# Altium PCB S7CAS-PLEIADES-CARTE-MERE_P01.PcbDoc (part 6 of 9)
Units mil, origin at the board's own origin, x right, y up, seen from the top; angles counter-clockwise.
Board outline 6153 x 3696 mil, 16 copper layers (Top, Ground Plane 1, Signal Layer 1, Ground Plane 2, Signal Layer 2, Ground Plane 3, Power Plane, Ground Plane 4, Ground Plane 5, Power Plane 2, Ground Plane 6, Signal Layer 3, Ground Plane 7, Signal Layer 4, Ground Plane 8, Bottom), stack 75.282 mil thick; 430 components, 328 nets, 2174 pads, 2158 vias.
Unrouted connection lines stored in the file: 202.
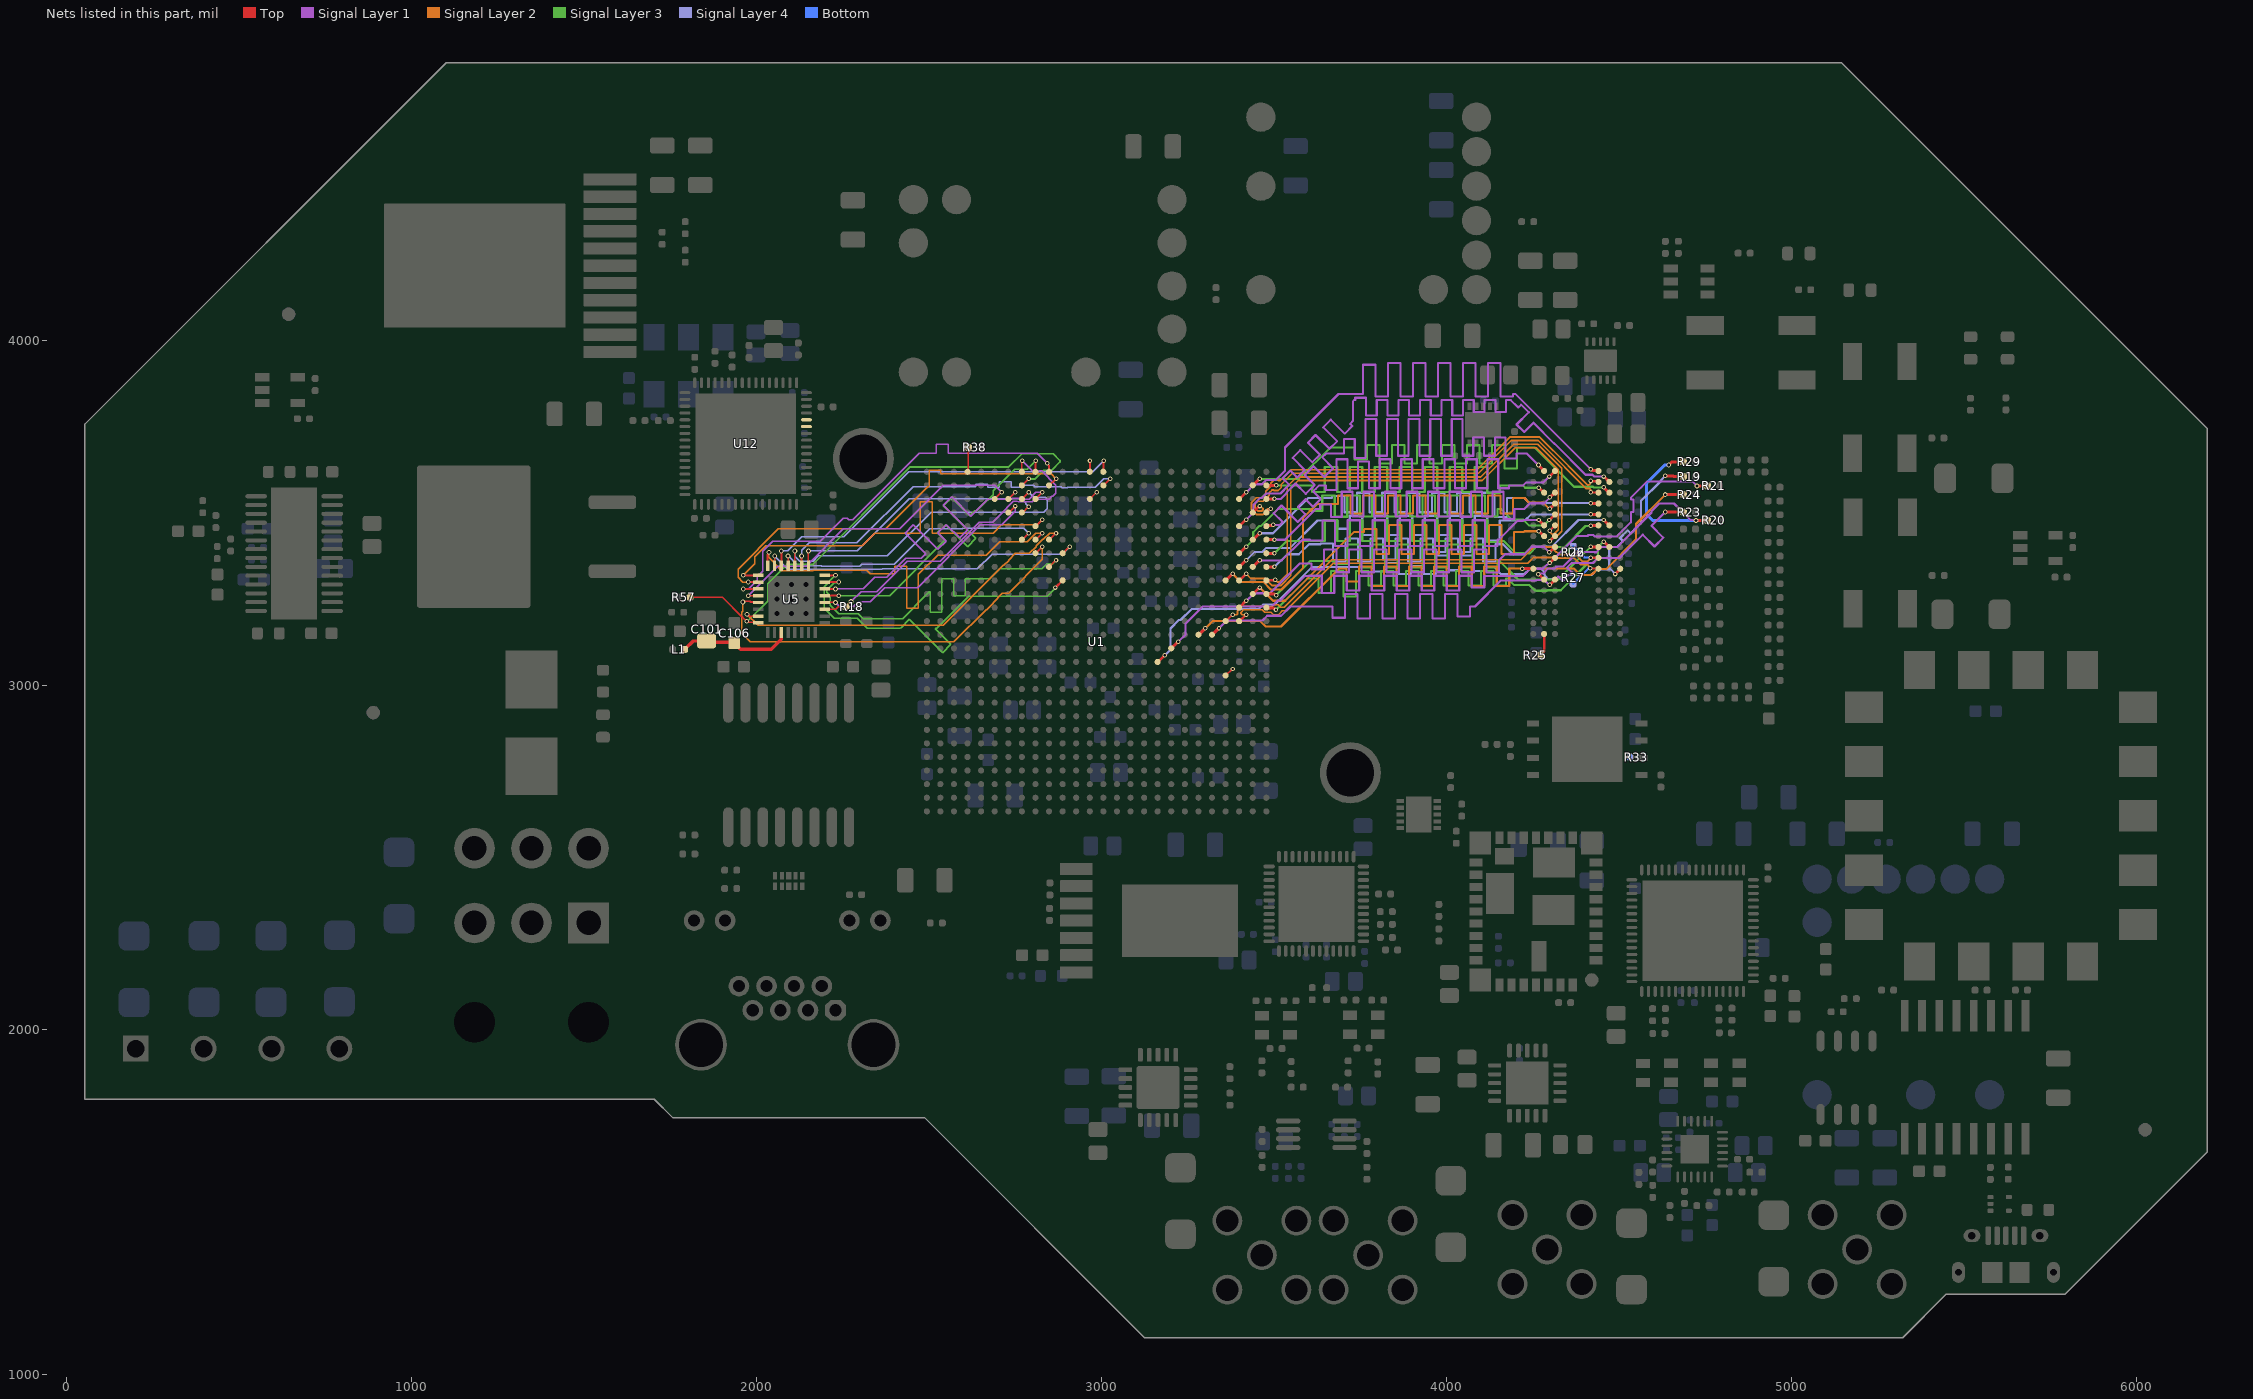
[diagram p18: the nets of this part, all layers, seen from the top]

## Via types
v1: diameter 14, hole 8, Top to Bottom, 1322 vias
v2: diameter 13, hole 7, Top to Bottom, 662 vias
v3: diameter 19.68, hole 7.87, Top to Bottom, 137 vias
v4: diameter 19.68, hole 11.81, Top to Bottom, 15 vias
v5: diameter 15.75, hole 7.87, Top to Bottom, 12 vias
v6: diameter 22, hole 12, Top to Bottom, 9 vias
v7: diameter 20, hole 12, Top to Bottom, 1 vias

## Nets (pads, with @x,y where several pads share a name; then routed paths per layer and width w, separated by ;. In a path a pad name is that pad's centre, name@x,y a point inside that pad or via, vN(x,y) a via of type N, cw(c..) or ccw(c..) an arc to the next point about the centre after c; other vN are vias at no path point) (continued)
DDR3_CK_N: R27.1 U1.R3 U2.K7 | length 1246.3
  Top w6.68: U1.R3@3400.33,3185.15 3400.33,3185.27 3419.15,3204.09 v2(3419.76,3204.09) ; v2(4417.4,3338.24) 4417.96,3337.68 4440.62,3337.68 U2.K7@4441.18,3337.12
  Signal Layer 2 w5.08: v2(3419.76,3204.09) 3419.7,3204.03 3408.15,3204.03 3405.18,3207 3405.18,3211.21 3412.17,3218.2 3466.28,3218.2 3473.34,3211.15 3491.89,3211.15 3500.06,3202.98 3512.52,3202.98 3521.33,3211.79 3521.33,3212.35 3524.3,3215.32 3534.58,3215.32 3672.16,3352.91 4236.17,3352.91 4253.16,3369.9 4321.49,3369.9 4322.82,3368.56 4369.56,3368.56 4389.68,3348.44 4404.94,3348.44 4405.37,3348.87 4409.58,3348.87 4412.55,3345.89 4412.55,3345.23 4417.4,3340.38 v2(4417.4,3338.24)
  Bottom w6.68: R27.1@4367.55,3292.82 4411.76,3337.03 4416.19,3337.03 v2(4417.4,3338.24)
DDR3_CK_P: R26.2 U1.R4 U2.J7 | length 1273.9
  Top w6.68: U1.R4@3360.96,3185.15 v2@3379.78,3203.97 ; v2(4418.98,3369.58) 4419.46,3369.1 4440.7,3369.1 U2.J7@4441.18,3368.61
  Signal Layer 2 w5.08: v2(3380.51,3203.97) 3380.57,3204.03 3392.12,3204.03 3395.1,3207 3395.1,3215.38 3408,3228.28 3470.46,3228.28 3477.52,3221.23 3488.28,3221.23 3491.25,3224.2 ; 3491.25,3224.25 3500.06,3233.06 3512.52,3233.06 3520.18,3225.4 3530.4,3225.4 3667.99,3362.98 4216.49,3362.98 4253.48,3399.97 4305.17,3399.97 4313.98,3391.16 4313.98,3389.68 4317.62,3386.03 4319.61,3386.03 4327,3378.64 4373.73,3378.64 4393.85,3358.52 4400.77,3358.52 4401.2,3358.95 4409.58,3358.95 4418.98,3368.35 v2(4418.98,3369.58)
  Bottom w6.68: R26.2@4368.03,3402.44 4400.89,3369.58 v2(4418.98,3369.58)
DDR3_CKE: R19.1 U1.M9 U2.K9 | length 2286.9
  Top w8.64: U1.M9@3164.11,3067.04 v2@3182.93,3085.86 ; v2(4490.19,3321.78) 4490.19,3322.45 4504.17,3336.43 U2.K9@4504.17,3337.12 ; v1(4634.98,3606.62) 4657.26,3606.62 4659.26,3604.62 4687.08,3604.62 R19.1@4687.48,3604.22
  Signal Layer 4 w6.24: v2(3183.66,3085.86) 3200.45,3102.64 3200.45,3164.1 3224.69,3188.35 3229.5,3188.35 3261.65,3220.49 3456.25,3220.49 3469.4,3233.64 3502.45,3233.64 3611.44,3342.63 3628.51,3342.63 3789.42,3342.63 3789.42,3329.34 3825.66,3329.34 3825.66,3353.48 3861.9,3353.48 3861.9,3322.02 3898.14,3322.02 3898.14,3345.03 3934.38,3345.03 3934.38,3322.02 3970.63,3322.02 3970.63,3375.83 4006.87,3375.83 4006.87,3332.9 4043.11,3332.9 4043.11,3375.83 4079.35,3375.83 4079.35,3330.79 4115.59,3330.79 4115.59,3342.63 4118.72,3342.63 4137.43,3342.63 4158.29,3321.76 4226.55,3321.76 4242.11,3337.32 4273.45,3337.32 4284.11,3326.66 4284.11,3319.96 4286.41,3317.66 4286.41,3316.15 4295.56,3307 4308.5,3307 4310.81,3309.3 4335.61,3309.3 4345.19,3318.88 4420.99,3318.88 4437.47,3335.36 4476.61,3335.36 ; v2(4490.19,3321.78) 4476.62,3335.36 ; v1(4634.98,3606.62) 4622.4,3594.04 4622.4,3591.64 4564.1,3533.34 4564.1,3469.07 4555.5,3460.47 4534.54,3439.52 4525.64,3448.42 4503.55,3426.33 4512.45,3417.43 4510.25,3415.22 4494.7,3399.67 4477.92,3399.67 4472.21,3393.96 4472.21,3377.58 4472.51,3377.28 4472.51,3339.46 4476.62,3335.36
DDR3_CS: R20.1 R29.1 U2.L2 | length 995
  Top w8.64: v2(4266.98,3321.7) 4267.3,3321.7 4283.38,3305.62 U2.L2@4283.7,3305.62 ; v1(4644.98,3637.72) 4654.48,3647.22 R29.1@4687.48,3647.22 ; v1(4723.89,3477.26) R20.1@4757.48,3477.29
  Signal Layer 1 w6.24: v2(4266.98,3321.7) 4268.27,3322.99 4280.31,3322.99 4295.56,3338.24 4314.29,3338.24 4319.66,3343.62 4338.92,3343.62 4380.5,3385.2 4428.97,3385.2 4429.23,3384.94 4434.83,3384.94 4449.57,3399.67 4494.7,3399.67 4594.98,3499.95 4594.98,3504.26 4617.08,3526.36 4659.98,3526.36 4707.59,3478.74 4722.41,3478.74 v1(4723.89,3477.26)
  Bottom w8.63: v1(4644.98,3637.72) 4633.07,3637.72 4580.66,3585.31 4580.66,3495.12 4598.52,3477.26 v1(4723.89,3477.26)
DDR3_DQ0: U1.Y3 U2.E3 | length 1875.8
  Top w8.64: U1.Y3@3400.33,3382 v2@3419.15,3400.82 ; v2@4299.06,3478.46 U2.E3@4315.2,3494.6
  Signal Layer 3 w6.24: v2(3419.88,3400.82) 3440.27,3421.21 3440.27,3443.3 3458.45,3461.48 3463.26,3461.48 3511.74,3509.95 3553.1,3509.95 3604.37,3509.95 3604.37,3504.94 3640.61,3504.94 3640.61,3549.2 3676.86,3549.2 3676.86,3487.98 3713.1,3487.98 3713.1,3549.2 3749.34,3549.2 3749.34,3488.37 3785.58,3488.37 3785.58,3549.2 3821.82,3549.2 3821.82,3488.37 3858.07,3488.37 3858.07,3549.2 3894.31,3549.2 3894.31,3488.37 3930.55,3488.37 3930.55,3549.2 3966.79,3549.2 3966.79,3488.37 4003.04,3488.37 4003.04,3549.2 4039.28,3549.2 4039.28,3488.37 4075.52,3488.37 4075.52,3549.2 4111.76,3549.2 4111.76,3488.37 4148,3488.37 4148,3509.95 4151.13,3509.95 4159.32,3509.95 4189.78,3479.5 4223.15,3479.5 4240.59,3462.05 4282.53,3462.05 v2(4298.94,3478.46)
DDR3_DQ1: U1.Y1 U2.F7 | length 1877.3
  Top w8.64: U1.Y1@3478.35,3382 v2(3501.9,3382) ; v2(4418.98,3462.05) 4419.5,3462.58 4440.66,3462.58 U2.F7@4441.18,3463.1
  Signal Layer 3 w6.24: v2(3501.9,3382) 3537.5,3417.6 3540.72,3417.6 3647.49,3417.6 3647.49,3477.74 3683.73,3477.74 3683.73,3417.6 3719.97,3417.6 3719.97,3478.13 3756.22,3478.13 3756.22,3417.6 3792.46,3417.6 3792.46,3478.13 3828.7,3478.13 3828.7,3417.6 3864.94,3417.6 3864.94,3478.13 3901.18,3478.13 3901.18,3417.6 3937.43,3417.6 3937.43,3478.13 3973.67,3478.13 3973.67,3417.6 4009.91,3417.6 4009.91,3478.13 4046.15,3478.13 4046.15,3417.6 4082.39,3417.6 4082.39,3478.13 4118.64,3478.13 4118.64,3415.12 4154.88,3415.12 4154.88,3417.6 4158,3417.6 4166.34,3417.6 4201.77,3382.17 4242.6,3382.17 4260.99,3400.56 4343.33,3400.56 4403.77,3460.99 4417.92,3460.99 v2(4418.98,3462.05)
DDR3_DQ2: U1.W2 U2.F2 | length 1959.5
  Top w8.64: U1.W2@3439.7,3342.63 v2@3458.52,3361.45 ; v2(4267.7,3478.46) 4268.03,3478.46 4283.38,3463.1 U2.F2@4283.7,3463.1
  Signal Layer 1 w6.24: v2(3459.25,3361.45) 3523.42,3361.45 3583.34,3421.37 3589.89,3421.37 3604.93,3421.37 3604.93,3419.15 3641.17,3419.15 3641.17,3477.31 3677.41,3477.31 3677.41,3402.83 3713.65,3402.83 3713.65,3477.85 3749.9,3477.85 3749.9,3402.83 3786.14,3402.83 3786.14,3477.85 3822.38,3477.85 3822.38,3402.83 3858.62,3402.83 3858.62,3477.85 3894.86,3477.85 3894.86,3402.83 3931.11,3402.83 3931.11,3477.85 3967.35,3477.85 3967.35,3402.83 4003.59,3402.83 4003.59,3477.85 4039.83,3477.85 4039.83,3402.83 4076.07,3402.83 4076.07,3477.85 4112.32,3477.85 4112.32,3402.83 4148.56,3402.83 4148.56,3421.37 4151.68,3421.37 4206.4,3476.09 4222.36,3476.09 4224.73,3478.46 v2(4267.7,3478.46)
DDR3_DQ3: U1.W1 U2.F8 | length 1858.1
  Top w8.64: U1.W1@3478.35,3342.63 v2(3501.9,3342.63) ; v2(4456.04,3478.46) 4456.68,3478.46 4472.04,3463.1 U2.F8@4472.68,3463.1
  Signal Layer 4 w6.24: v2(3501.9,3342.63) 3538.49,3379.22 3572.79,3379.22 3601.79,3408.22 3628.51,3408.22 3635.1,3408.22 3635.1,3410.52 3671.34,3410.52 3671.34,3358.25 3707.59,3358.25 3707.59,3424.47 3743.83,3424.47 3743.83,3358.25 3780.07,3358.25 3780.07,3424.47 3816.31,3424.47 3816.31,3363.73 3852.55,3363.73 3852.55,3424.47 3888.8,3424.47 3888.8,3358.25 3925.04,3358.25 3925.04,3424.47 3961.28,3424.47 3961.28,3386.07 3997.52,3386.07 3997.52,3424.47 4033.76,3424.47 4033.76,3386.07 4070.01,3386.07 4070.01,3424.47 4106.25,3424.47 4106.25,3358.25 4142.49,3358.25 4142.49,3408.22 4145.61,3408.22 4164.23,3408.22 4193.46,3378.99 4226.87,3378.99 4248.61,3400.73 4305.66,3400.73 4383.39,3478.46 v2(4456.04,3478.46)
DDR3_DQ4: U1.T3 U2.H3 | length 1960.5
  Top w8.64: U1.T3@3400.33,3224.52 3400.33,3224.89 3419.53,3244.09 v2(3419.88,3244.09) ; v2(4298.94,3384.94) 4299.48,3384.94 4314.65,3400.11 U2.H3@4315.2,3400.11
  Signal Layer 1 w6.24: v2(3419.88,3244.09) 3420.63,3244.09 3442.85,3266.3 3488.96,3266.3 3575.13,3352.47 3589.89,3352.47 3608.98,3352.47 3608.98,3335.69 3645.22,3335.69 3645.22,3392.59 3681.46,3392.59 3681.46,3326.89 3717.71,3326.89 3717.71,3392.59 3753.95,3392.59 3753.95,3326.89 3790.19,3326.89 3790.19,3392.59 3826.43,3392.59 3826.43,3326.89 3862.67,3326.89 3862.67,3392.59 3898.92,3392.59 3898.92,3326.89 3935.16,3326.89 3935.16,3392.59 3971.4,3392.59 3971.4,3326.89 4007.64,3326.89 4007.64,3392.59 4043.88,3392.59 4043.88,3326.89 4080.13,3326.89 4080.13,3392.59 4116.37,3392.59 4116.37,3326.35 4152.61,3326.35 4152.61,3361.4 4155.73,3364.52 4170.2,3378.99 4225.92,3378.99 4247.65,3400.73 4282.86,3400.73 4298.65,3384.94 v2(4298.94,3384.94)
DDR3_DQ5: U1.T1 U2.H8 | length 1875.3
  Top w8.64: U1.T1@3478.35,3224.52 3479.9,3222.96 3500.16,3222.96 3505.11,3218.02 v2(3506.29,3218.02) ; v2(4456.29,3415.37) 4456.86,3415.37 4472.11,3400.11 U2.H8@4472.68,3400.11
  Signal Layer 3 w6.24: v2(3506.29,3218.02) 3596.79,3308.52 3629.26,3308.52 3629.26,3267.04 3665.51,3267.04 3665.51,3330.91 3701.75,3330.91 3701.75,3256.81 3737.99,3256.81 3737.99,3330.91 3774.23,3330.91 3774.23,3288.3 3810.48,3288.3 3810.48,3330.91 3846.72,3330.91 3846.72,3288.3 3882.96,3288.3 3882.96,3330.91 3919.2,3330.91 3919.2,3288.3 3955.44,3288.3 3955.44,3330.91 3991.69,3330.91 3991.69,3288.3 4027.93,3288.3 4027.93,3330.91 4064.17,3330.91 4064.17,3288.3 4100.41,3288.3 4100.41,3330.91 4136.65,3330.91 4136.65,3288.3 4172.9,3288.3 4172.9,3308.52 4176.02,3308.52 4177.96,3308.52 4196.73,3289.75 4241.36,3289.75 4256.98,3274.13 4260.21,3274.13 4260.91,3273.43 4291.11,3273.43 4292.6,3274.92 4331.99,3274.92 4410.93,3353.86 4425.35,3353.86 4439.63,3368.14 4439.63,3399.85 4455.15,3415.37 v2(4456.29,3415.37)
DDR3_DQ6: U1.U2 U2.G2 | length 1936.4
  Top w8.64: U1.U2@3439.7,3263.89 v2@3458.52,3282.71 ; v2(4268.3,3445.65) 4268.98,3445.65 4283.02,3431.61 U2.G2@4283.7,3431.61
  Signal Layer 2 w6.24: v2(3459.25,3282.71) 3497.55,3244.41 3533.59,3244.41 3733.25,3444.07 3742.43,3444.07 3761.37,3444.07 3761.37,3452.02 3797.61,3452.02 3797.61,3380.21 3833.85,3380.21 3833.85,3463.88 3870.1,3463.88 3870.1,3380.21 3906.34,3380.21 3906.34,3463.88 3942.58,3463.88 3942.58,3380.21 3978.82,3380.21 3978.82,3463.88 4015.07,3463.88 4015.07,3380.21 4051.31,3380.21 4051.31,3463.88 4087.55,3463.88 4087.55,3380.21 4123.79,3380.21 4123.79,3463.88 4160.03,3463.88 4160.03,3380.21 4196.28,3380.21 4196.28,3444.07 4199.4,3444.07 4225.76,3444.07 4227.34,3445.65 v2(4268.3,3445.65)
DDR3_DQ7: U1.U1 U2.H7 | length 1877.5
  Top w8.64: U1.U1@3478.35,3263.89 3502.07,3263.89 3505.32,3260.64 v2(3506.5,3260.64) ; v2(4418.98,3400.82) 4419.33,3400.46 4440.83,3400.46 U2.H7@4441.18,3400.11
  Signal Layer 3 w6.24: v2(3506.5,3260.64) 3605.08,3359.22 3624.98,3359.22 3677.04,3359.22 3677.04,3351.37 3713.28,3351.37 3713.28,3407.36 3749.53,3407.36 3749.53,3341.16 3785.77,3341.16 3785.77,3407.36 3822.01,3407.36 3822.01,3341.16 3858.25,3341.16 3858.25,3407.36 3894.49,3407.36 3894.49,3341.16 3930.74,3341.16 3930.74,3407.36 3966.98,3407.36 3966.98,3341.16 4003.22,3341.16 4003.22,3407.36 4039.46,3407.36 4039.46,3341.16 4075.7,3341.16 4075.7,3407.36 4111.95,3407.36 4111.95,3341.16 4148.19,3341.16 4148.19,3359.22 4151.31,3359.22 4154.9,3359.22 4207.96,3306.16 4259.78,3306.16 4260.86,3305.08 4273.8,3305.08 4274.89,3306.16 4324.32,3306.16 v2(4418.98,3400.82)
DDR3_DQ8: U1.AA2 U2.D7 | length 1856.9
  Top w8.64: U1.AA2@3439.7,3421.37 v2@3458.52,3440.19 ; v2(4418.98,3527.58) 4419.72,3526.84 4440.44,3526.84 U2.D7@4441.18,3526.09
  Signal Layer 4 w6.24: v2(3459.25,3440.19) 3497.76,3440.19 3599.55,3541.98 3628.96,3541.98 3668.22,3541.98 3668.22,3547.55 3704.46,3547.55 3704.46,3501.03 3740.71,3501.03 3740.71,3557.59 3776.95,3557.59 3776.95,3501.03 3813.19,3501.03 3813.19,3557.59 3849.43,3557.59 3849.43,3501.03 3885.67,3501.03 3885.67,3557.59 3921.92,3557.59 3921.92,3501.03 3958.16,3501.03 3958.16,3557.59 3994.4,3557.59 3994.4,3501.03 4030.64,3501.03 4030.64,3557.59 4066.89,3557.59 4066.89,3501.03 4103.13,3501.03 4103.13,3557.59 4139.37,3557.59 4139.37,3487.12 4175.61,3487.12 4175.61,3541.98 4178.73,3541.98 4226.55,3541.98 4240.68,3527.85 4418.71,3527.85 v2(4418.98,3527.58)
DDR3_DQ9: U1.AA1 U2.C3 | length 2135.7
  Top w8.64: U1.AA1@3478.35,3421.37 v2(3501.9,3421.37) ; v2(4300.24,3544.08) 4300.96,3544.08 4314.48,3557.59 U2.C3@4315.2,3557.59
  Signal Layer 1 w6.24: v2(3501.9,3421.37) 3532.5,3421.37 3621.08,3509.95 3634.6,3509.95 3634.6,3523.47 3665.84,3523.47 3665.84,3487.55 3697.08,3487.55 3697.08,3560.33 3728.33,3560.33 3728.33,3488.09 3759.57,3488.09 3759.57,3560.33 3790.81,3560.33 3790.81,3488.09 3822.05,3488.09 3822.05,3560.33 3853.29,3560.33 3853.29,3488.09 3884.54,3488.09 3884.54,3560.33 3915.78,3560.33 3915.78,3488.09 3947.02,3488.09 3947.02,3560.33 3978.26,3560.33 3978.26,3488.09 4009.5,3488.09 4009.5,3560.33 4040.75,3560.33 4040.75,3488.05 4071.99,3488.05 4071.99,3560.33 4103.23,3560.33 4103.23,3488.09 4134.47,3488.09 4134.47,3560.33 4165.71,3560.33 4165.71,3481.13 4196.96,3481.13 4196.96,3509.95 4200.08,3509.95 4200.86,3510.74 4226.55,3510.74 4231.32,3515.51 4242.79,3526.97 4284.38,3526.97 4300.24,3542.84 v2(4300.24,3544.08)
DDR3_DQ10: U1.AE2 U2.C8 | length 1877.5
  Top w8.64: U1.AE2@3438.98,3578.85 3439.7,3578.85 3458.52,3597.67 v2(3459.25,3597.67) ; v2(4456.04,3572.94) 4456.68,3572.94 4472.04,3557.59 U2.C8@4472.68,3557.59
  Signal Layer 3 w6.24: v2(3459.25,3597.67) 3572.61,3597.67 3663.17,3688.22 3701.75,3688.22 3733.69,3688.22 3733.69,3654.22 3769.93,3654.22 3769.93,3696.32 3806.17,3696.32 3806.17,3642.46 3842.42,3642.46 3842.42,3696.32 3878.66,3696.32 3878.66,3642.46 3914.9,3642.46 3914.9,3696.32 3951.14,3696.32 3951.14,3642.46 3987.39,3642.46 3987.39,3696.32 4023.63,3696.32 4023.63,3642.46 4059.87,3642.46 4059.87,3696.32 4096.11,3696.32 4096.11,3642.46 4132.35,3642.46 4132.35,3696.32 4168.6,3696.32 4168.6,3627.43 4204.84,3627.43 4204.84,3688.22 4207.96,3688.22 4256.98,3688.22 4370.21,3574.99 4424.38,3574.99 4426.42,3572.94 v2(4456.04,3572.94)
DDR3_DQ11: U1.AE1 U2.C2 | length 1877.1
  Top w8.64: U1.AE1@3478.35,3578.85 v2(3506.5,3578.85) ; v2(4268.14,3571.81) 4268.81,3571.81 4283.03,3557.59 U2.C2@4283.7,3557.59
  Signal Layer 3 w6.24: v2(3506.5,3578.85) 3597.21,3578.85 3611.25,3578.85 3611.25,3559.45 3647.49,3559.45 3647.49,3632.22 3683.73,3632.22 3683.73,3559.45 3719.97,3559.45 3719.97,3632.22 3756.22,3632.22 3756.22,3559.45 3792.46,3559.45 3792.46,3632.22 3828.7,3632.22 3828.7,3559.45 3864.94,3559.45 3864.94,3632.22 3901.18,3632.22 3901.18,3559.45 3937.43,3559.45 3937.43,3632.22 3973.67,3632.22 3973.67,3559.45 4009.91,3559.45 4009.91,3632.22 4046.15,3632.22 4046.15,3559.45 4082.39,3559.45 4082.39,3632.22 4118.64,3632.22 4118.64,3556.8 4154.88,3556.8 4154.88,3578.85 4158,3578.85 4221.77,3578.85 4228.81,3571.81 v2(4268.14,3571.81)
DDR3_DQ12: U1.AD3 U2.A7 | length 2453.5
  Top w8.64: U1.AD3@3400.33,3539.48 v2@3419.15,3558.3 ; v2(4418.98,3625.21) 4420.16,3625.21 4423.04,3622.32 4439.44,3622.32 U2.A7@4441.18,3620.58
  Signal Layer 1 w6.24: v2(3419.88,3558.3) 3443.63,3582.05 3465.72,3582.05 3478.15,3594.47 3505.7,3594.47 3532.5,3621.27 3532.5,3688.74 3685.93,3842.18 3686.98,3843.22 3758.93,3843.22 3758.93,3928.39 3795.17,3928.39 3795.17,3836.28 3831.41,3836.28 3831.41,3933.44 3867.66,3933.44 3867.66,3836.28 3903.9,3836.28 3903.9,3933.44 3940.14,3933.44 3940.14,3836.28 3976.38,3836.28 3976.38,3933.44 4012.62,3933.44 4012.62,3836.28 4048.87,3836.28 4048.87,3933.44 4085.11,3933.44 4085.11,3836.28 4121.35,3836.28 4121.35,3933.44 4157.59,3933.44 4157.59,3836.28 4193.84,3836.28 4193.84,3843.22 4196.96,3843.22 4200.96,3843.22 v2(4418.98,3625.21)
DDR3_DQ13: U1.AD1 U2.A2 | length 2455.7
  Top w8.64: U1.AD1@3478.05,3539.15 3478.42,3539.52 3501.93,3539.52 v2(3501.97,3539.57) ; v1(4267.06,3637.72) 4267.06,3637.47 4283.7,3620.83 U2.A2@4283.7,3620.58
  Signal Layer 1 w6.24: v2(3501.97,3539.57) 3502.38,3539.57 3520.33,3539.57 3520.73,3539.97 3535.95,3555.19 3538.15,3557.4 3537.04,3558.51 3562.67,3584.13 3592.7,3554.1 3618.33,3579.73 3589.41,3608.65 3615.03,3634.28 3646.11,3603.2 3671.74,3628.83 3640.66,3659.9 3650.51,3669.75 3651.98,3671.22 3682.19,3671.22 3703.41,3671.22 3703.41,3713.32 3734.65,3713.32 3734.65,3657.99 3765.89,3657.99 3765.89,3771.03 3797.13,3771.03 3797.13,3664.69 3828.38,3664.69 3828.38,3771.03 3859.62,3771.03 3859.62,3664.69 3890.86,3664.69 3890.86,3771.03 3922.1,3771.03 3922.1,3664.69 3953.34,3664.69 3953.34,3771.03 3984.59,3771.03 3984.59,3664.69 4015.83,3664.69 4015.83,3771.03 4047.07,3771.03 4047.07,3664.69 4078.31,3664.69 4078.31,3717.73 4109.55,3717.73 4109.55,3664.69 4140.8,3664.69 4140.8,3717.73 4172.04,3717.73 4172.04,3657.18 4203.28,3657.18 4203.28,3671.22 4206.4,3671.22 4233.56,3671.22 v1(4267.06,3637.72)
DDR3_DQ14: U1.AB3 U2.B8 | length 2452.8
  Top w8.64: U1.AB3@3400.33,3460.74 v2@3419.15,3479.56 ; v2(4456.6,3604.44) 4456.96,3604.44 4472.31,3589.09 U2.B8@4472.68,3589.09
  Signal Layer 1 w6.24: v2(3419.88,3479.56) 3441.5,3501.18 3441.5,3523.27 3460.91,3542.68 3465.72,3542.68 3478.23,3555.19 3519.24,3555.19 3542.29,3578.24 3544.5,3580.45 3525.33,3599.61 3547.42,3621.71 3567.7,3601.43 3589.79,3623.52 3554.77,3658.54 3576.86,3680.63 3611.88,3645.61 3633.97,3667.7 3598.96,3702.72 3621.05,3724.81 3661.34,3684.52 3683.44,3706.61 3643.14,3746.9 3665.23,3769 3705.53,3728.7 3727.62,3750.79 3721.23,3757.18 3729.27,3765.22 3729.27,3822.38 3732.93,3826.03 3736.05,3826.03 3736.05,3832.98 3767.29,3832.98 3767.29,3781.27 3798.54,3781.27 3798.54,3826.03 3829.78,3826.03 3829.78,3781.27 3861.02,3781.27 3861.02,3826.03 3892.26,3826.03 3892.26,3781.27 3923.51,3781.27 3923.51,3826.03 3954.75,3826.03 3954.75,3781.27 3985.99,3781.27 3985.99,3826.03 4017.23,3826.03 4017.23,3781.27 4048.47,3781.27 4048.47,3826.03 4079.72,3826.03 4079.72,3791.09 4110.96,3791.09 4110.96,3826.03 4142.2,3826.03 4142.2,3791.09 4173.44,3791.09 4173.44,3826.03 4181.98,3826.03 4187.16,3826.03 4206.4,3806.79 4208.61,3804.59 4216.86,3812.84 4238.95,3790.75 4203.71,3755.5 4225.8,3733.41 4252.79,3760.4 4311.86,3701.34 4314.07,3699.13 4403.61,3609.59 4424.08,3609.59 4429.23,3604.44 v2(4456.6,3604.44)
DDR3_DQ15: U1.AB1 U2.A3 | length 2454.8
  Top w8.64: U1.AB1@3478.35,3460.74 3480.08,3462.48 3495.66,3462.48 3497.32,3464.14 v2(3498.5,3464.14) ; v2(4298.82,3604.44) 4298.94,3604.44 4315.08,3620.58 U2.A3@4315.2,3620.58
  Signal Layer 1 w6.24: v2(3498.5,3464.14) 3517.23,3464.14 3523.42,3470.33 3525.62,3472.53 3499.97,3498.19 3522.06,3520.28 3569.49,3472.85 3591.58,3494.94 3569.81,3516.72 3591.9,3538.81 3613.67,3517.03 3635.76,3539.12 3613.99,3560.9 3621.67,3568.57 3631.94,3578.85 3650.74,3578.85 3650.74,3565.19 3681.98,3565.19 3681.98,3654.45 3713.22,3654.45 3713.22,3570.57 3744.47,3570.57 3744.47,3647.75 3775.71,3647.75 3775.71,3570.57 3806.95,3570.57 3806.95,3654.45 3838.19,3654.45 3838.19,3570.57 3869.43,3570.57 3869.43,3654.45 3900.68,3654.45 3900.68,3570.57 3931.92,3570.57 3931.92,3654.45 3963.16,3654.45 3963.16,3570.57 3994.4,3570.57 3994.4,3654.45 4025.64,3654.45 4025.64,3570.57 4056.89,3570.57 4056.89,3654.45 4088.13,3654.45 4088.13,3570.57 4119.37,3570.57 4119.37,3654.45 4150.61,3654.45 4150.61,3570.57 4181.85,3570.57 4181.85,3578.85 4184.98,3578.85 4223,3578.85 4231.59,3587.44 4281.89,3587.44 v2(4298.82,3604.44) v2(4298.82,3604.44)
DDR3_LDM: U1.W3 U2.E7 | length 1856.7
  Top w8.64: U1.W3@3400.33,3342.63 v2@3419.15,3361.45 ; v2(4418.98,3494.86) 4419.11,3494.73 4441.05,3494.73 U2.E7@4441.18,3494.6
  Signal Layer 4 w6.24: v2(3419.88,3361.45) 3443.63,3385.2 3465.72,3385.2 3478.15,3397.62 3547.38,3397.62 3626.63,3476.88 3636.92,3476.88 3684.03,3476.88 3684.03,3452.85 3720.27,3452.85 3720.27,3490.78 3756.51,3490.78 3756.51,3434.71 3792.75,3434.71 3792.75,3490.78 3828.99,3490.78 3828.99,3434.71 3865.24,3434.71 3865.24,3490.78 3901.48,3490.78 3901.48,3434.71 3937.72,3434.71 3937.72,3490.78 3973.96,3490.78 3973.96,3434.71 4010.2,3434.71 4010.2,3490.78 4046.45,3490.78 4046.45,3434.71 4082.69,3434.71 4082.69,3490.78 4118.93,3490.78 4118.93,3418.46 4155.17,3418.46 4155.17,3476.88 4158.29,3476.88 4228.31,3476.88 4246.29,3494.86 v2(4418.98,3494.86)
DDR3_LDQS_N: U1.V1 U2.G3 | length 1453.8
  Top w6.68: U1.V1@3478.35,3303.26 3479.29,3304.21 3503.66,3304.21 v2(3504.61,3305.15) ; v2(4300.24,3417.4) 4300.62,3417.4 4314.82,3431.61 U2.G3@4315.2,3431.61
  Signal Layer 2 w5.08: v2(3504.61,3305.15) 3504.85,3305.15 3511.54,3298.46 3515.75,3298.46 3538.92,3321.64 3538.92,3575.53 3566.58,3603.19 4100.18,3603.19 4195.22,3698.24 4264.65,3698.24 4334.42,3628.47 4334.42,3445.62 4315.94,3427.14 4307.56,3427.14 4304.59,3424.17 4304.59,3423.89 4300.24,3419.54 v2(4300.24,3417.4)
DDR3_LDQS_P: U1.V3 U2.F3 | length 1517.4
  Top w6.68: U1.V3@3400.33,3303.26 v2@3419.15,3322.08 ; v2(4300.24,3446.96) 4300.24,3447.55 4315.2,3462.51 U2.F3@4315.2,3463.1
  Signal Layer 2 w5.08: v2(3419.88,3322.08) 3433.19,3308.77 3474.63,3308.77 3495.02,3288.38 3519.92,3288.38 3549,3317.46 3549,3571.36 3570.75,3593.11 4104.35,3593.11 4199.4,3688.16 4260.48,3688.16 4324.34,3624.29 4324.34,3449.79 4311.77,3437.22 4307.56,3437.22 4304.59,3440.19 4304.59,3440.47 4300.24,3444.82 v2(4300.24,3446.96)
DDR3_ODT: R24.1 U1.P6 U2.K1 | length 2409.4
  Top w8.64: U1.P6@3282.22,3145.78 v2@3301.04,3164.6 ; v2(4220.08,3337.38) 4220.21,3337.25 4252.07,3337.25 U2.K1@4252.2,3337.12 ; v1(4634.98,3551.96) R24.1@4687.48,3551.96
  Signal Layer 2 w6.24: v2(3301.77,3164.6) 3322.32,3185.15 3460.79,3185.15 3476.41,3169.53 3521.06,3169.53 3688.92,3337.38 3701.95,3337.38 3711.18,3337.38 3711.18,3300.41 3747.42,3300.41 3747.42,3343.25 3783.66,3343.25 3783.66,3286.96 3819.9,3286.96 3819.9,3343.25 3856.15,3343.25 3856.15,3286.96 3892.39,3286.96 3892.39,3343.25 3928.63,3343.25 3928.63,3286.96 3964.87,3286.96 3964.87,3343.25 4001.11,3343.25 4001.11,3286.96 4037.36,3286.96 4037.36,3343.25 4073.6,3343.25 4073.6,3286.96 4109.84,3286.96 4109.84,3343.25 4146.08,3343.25 4146.08,3286.96 4182.33,3286.96 4182.33,3337.38 4185.45,3337.38 v2(4220.08,3337.38) 4294.7,3337.38 4295.56,3338.24 4368.7,3338.24 4388.06,3318.88 4418.98,3318.88 4421.86,3321.76 4423.87,3321.76 4438.08,3335.97 4463.36,3335.97 4549.98,3422.58 4549.98,3466.96 v1(4634.98,3551.96)
DDR3_RAS: R21.1 U1.N8 U2.J3 | length 2454.7
  Top w8.64: U1.N8@3203.48,3106.41 v2@3222.3,3125.23 ; v2(4299.56,3353.86) 4300,3353.86 4314.75,3368.61 U2.J3@4315.2,3368.61 ; v1(4726.48,3577.29) R21.1@4757.48,3577.29
  Signal Layer 1 w6.24: v2(3223.03,3125.23) 3243.98,3146.17 3243.98,3177.22 3294.47,3227.72 3493.9,3227.72 3511.2,3245.02 3519.04,3245.02 3589.78,3315.76 3599.69,3315.76 3602.81,3315.76 3602.81,3316.65 3639.06,3316.65 3639.06,3266.79 3675.3,3266.79 3675.3,3316.65 3711.54,3316.65 3711.54,3273.99 3747.78,3273.99 3747.78,3316.65 3784.03,3316.65 3784.03,3273.99 3820.27,3273.99 3820.27,3316.65 3856.51,3316.65 3856.51,3273.99 3892.75,3273.99 3892.75,3316.65 3928.99,3316.65 3928.99,3273.99 3965.24,3273.99 3965.24,3316.65 4001.48,3316.65 4001.48,3273.99 4037.72,3273.99 4037.72,3316.65 4073.96,3316.65 4073.96,3282.26 4110.2,3282.26 4110.2,3315.76 4151.68,3315.76 4221.41,3315.76 4242.97,3337.32 4280.16,3337.32 4291.32,3348.48 4292.35,3348.48 4297.02,3353.15 v2@4300.09,3353.15 ; v2(4299.56,3353.86) 4377.83,3432.13 4409.2,3432.13 4412.51,3435.44 4425.45,3435.44 4429.9,3430.99 4460.1,3430.99 4460.17,3430.91 4494.05,3430.91 4509.09,3445.95 4534.98,3471.84 4534.98,3501.59 4542.41,3501.59 4542.41,3537.84 4534.98,3537.84 4534.98,3540.96 4534.98,3542.84 4565.09,3572.94 4582.63,3590.49 4713.27,3590.49 v1(4726.48,3577.29)
DDR3_RESET: R25.2 U1.L4 U2.T2 | length 92.5
  Top w4: U1.L4@3360.96,3027.67 v2@3379.78,3046.49
  Top w7: R25.2@4274.98,3085.86 4274.98,3088.02 4283.7,3096.75 U2.T2@4283.7,3148.14
  other v2: 3380.51,3046.49
DDR3_UDM: U1.V4 U2.D3 | length 1936.3
  Top w8.64: U1.V4@3360.96,3303.26 v2@3379.78,3322.08 ; v2(4299.87,3511.27) 4300.12,3511.27 4314.95,3526.09 U2.D3@4315.2,3526.09
  Signal Layer 2 w6.24: v2(3380.51,3322.08) 3403.48,3299.11 3469.43,3299.11 3491.5,3277.04 3522.24,3277.04 3584.18,3338.98 3584.18,3483.88 3622.31,3522.01 3625.08,3524.78 3649.52,3524.78 ; 3649.52,3524.77 3685.76,3524.77 3685.76,3549.61 3722.01,3549.61 3722.01,3497.27 3758.25,3497.27 3758.25,3549.61 3794.49,3549.61 3794.49,3497.27 3830.73,3497.27 3830.73,3549.61 3866.98,3549.61 3866.98,3497.27 3903.22,3497.27 3903.22,3549.61 3939.46,3549.61 3939.46,3497.27 3975.7,3497.27 3975.7,3549.61 4011.94,3549.61 4011.94,3497.27 4048.19,3497.27 4048.19,3549.61 4084.43,3549.61 4084.43,3497.27 4120.67,3497.27 4120.67,3549.61 4156.91,3549.61 4156.91,3497.27 4193.15,3497.27 4193.15,3541.98 4196.28,3541.98 4226.55,3541.98 4239.93,3528.6 4281.5,3528.6 4298.83,3511.27 v2(4299.87,3511.27)
DDR3_UDQS_N: U1.AC1 U2.B7 | length 1271.2
  Top w6.68: U1.AC1@3478.35,3500.11 3479.07,3500.11 3490.12,3511.16 v2(3490.85,3511.16) ; v1(4418.98,3591.9) 4420.38,3590.49 4439.77,3590.49 U2.B7@4441.18,3589.09
  Signal Layer 2 w5.08: v2(3490.85,3511.16) 3490.31,3510.62 3481.59,3510.62 3478.54,3507.57 3478.54,3503.48 3469.67,3494.6 3449.36,3494.6 3435.06,3508.91 3435.06,3528.95 3449.23,3543.12 3465.35,3543.12 3476.74,3554.52 3476.74,3561.35 3491.46,3576.06 3491.46,3585.08 3500.27,3593.89 3512.73,3593.89 3513.71,3592.91 3519,3592.91 3549.9,3623.81 4089.18,3623.81 4184.22,3718.85 4271.12,3718.85 4353.58,3636.4 4353.58,3635.32 4408.76,3580.14 4414.27,3580.14 4417.27,3583.14 4417.27,3590.19 v1(4418.98,3591.9)
DDR3_UDQS_P: U1.AC2 U2.C7 | length 1232.9
  Top w6.68: U1.AC2@3439.7,3500.11 v2@3458.52,3518.93 ; v2(4418.98,3558.3) 4419.33,3557.94 4440.83,3557.94 U2.C7@4441.18,3557.59
  Signal Layer 2 w5.08: v2(3459.25,3518.93) 3461.4,3518.93 3468.47,3511.86 3468.47,3507.65 3465.49,3504.68 3453.54,3504.68 3445.13,3513.08 3445.13,3524.78 3453.4,3533.05 3469.52,3533.05 3486.82,3550.35 3486.82,3557.17 3494.76,3565.11 3498.97,3565.11 3500.27,3563.81 3512.73,3563.81 3521.54,3572.62 3521.54,3581.19 3554.08,3613.73 4093.35,3613.73 4188.4,3708.78 4266.95,3708.78 4343.5,3632.23 4343.5,3631.14 4404.58,3570.06 4414.98,3570.06 4417.95,3567.08 4417.95,3559.32 v2(4418.98,3558.3)
DDR3_WE: R23.1 U1.P5 U2.L3 | length 2443.7
  Top w8.64: U1.P5@3321.59,3145.78 v2@3340.41,3164.6 ; v2(4300.33,3290.54) 4300.33,3290.65 4315.2,3305.52 U2.L3@4315.2,3305.62 ; v1(4634.98,3501.52) R23.1@4687.48,3501.52
  Signal Layer 1 w6.24: v2(3341.14,3164.6) 3363.62,3187.08 3466.99,3187.08 3480.69,3200.77 3521.11,3200.77 3548.15,3227.8 3564.21,3227.8 3669.78,3227.8 3669.78,3195.11 3706.02,3195.11 3706.02,3263.75 3742.26,3263.75 3742.26,3192.58 3778.5,3192.58 3778.5,3263.75 3814.75,3263.75 3814.75,3192.58 3850.99,3192.58 3850.99,3263.75 3887.23,3263.75 3887.23,3192.58 3923.47,3192.58 3923.47,3263.75 3959.71,3263.75 3959.71,3192.58 3995.96,3192.58 3995.96,3263.75 4032.2,3263.75 4032.2,3198.54 4068.44,3198.54 4068.44,3227.8 4071.56,3227.8 4083.15,3227.8 4158.85,3303.51 4260.91,3303.51 4262.07,3304.67 4275.01,3304.67 4276.17,3303.51 4284.56,3303.51 4291.32,3296.75 4292.29,3296.75 v2@4298.5,3290.54 ; v2(4300.33,3290.54) 4314.29,3304.5 4324.52,3314.74 4337.87,3301.39 4363.49,3327.02 4350.15,3340.36 4352.36,3342.57 4363.65,3353.86 4418.98,3353.86 4419.07,3353.96 4425.45,3353.96 4434.6,3363.11 4434.6,3363.75 4439.28,3368.43 4501.89,3368.43 4517.51,3384.05 4543.8,3410.34 4569.43,3435.97 4603.64,3401.75 4629.27,3427.38 4595.05,3461.6 4597.26,3463.8 v1(4634.98,3501.52)
DIN: R33.1 U1.AD20 | length 26.6
  Top w4: U1.AD20@2731.04,3539.48 v2@2749.86,3558.3
  other v2: 2750.59,3558.3
DONE: R38.1 U1.AF23 | length 71.7
  Top w4: U1.AF23@2612.2,3618.22 2613.59,3619.61 2613.59,3687.35 R38.1@2614.98,3688.74
ETH_3V3: C101.2 C106.2 L1.1 U5.3 | length 332.5
  Top w10: L1.1@1792.07,3103.26 1816.48,3127.68 C101.2@1855.57,3127.68 1859.77,3123.48 1933.86,3123.48 1954.07,3103.26 2042.62,3103.26 2072.24,3132.88 U5.3@2072.24,3152.72
ETH_COL: U1.AD21 U5.28 | length 931.1
  Top w4: v1(1976.53,3259.02) U5.28@2005.31,3259.02 ; U1.AD21@2691.67,3539.48 v2@2710.49,3558.3
  Signal Layer 1 w4: v1(1976.53,3259.02) 2062.29,3344.78 2143.89,3344.78 2251.87,3452.76 2415.03,3452.76 2541.13,3578.85 2690.67,3578.85 v2(2711.22,3558.3)
ETH_CRS: U1.Y18 U5.29 | length 1184.2
  Top w4: v1(1960.77,3240.71) 1962.6,3242.54 1981.59,3242.54 ; U1.Y18@2809.78,3382 v2@2828.6,3400.82
  Top w5.73: 1981.59,3242.54 1982.74,3241.39 2003.25,3241.39 U5.29@2005.31,3239.33
  Signal Layer 2 w4: v1(1960.77,3240.71) 1960.02,3239.96 1960.02,3213.85 1957.18,3211 1957.18,3150.62 1982.57,3125.23 2572.6,3125.23 2665.84,3218.47 2667.49,3218.47 2686.35,3237.33 2686.35,3238.97 2712.95,3265.57 2730.91,3265.57 2829.33,3363.99 v2(2829.33,3400.82)
ETH_INTR: U1.AA19 U5.21 | length 817.6
  Top w4: U5.21@2091.92,3345.63 v1(2091.92,3374.41) ; U1.AA19@2770.41,3421.37 v2@2789.23,3440.19
  Signal Layer 4 w4: v1(2091.92,3374.41) 2120.55,3345.78 2188.29,3345.78 2189.69,3344.38 2299.73,3344.38 2305.13,3349.78 2399.13,3349.78 2503.13,3453.78 2597.13,3453.78 2598.04,3454.69 2775.46,3454.69 v2(2789.96,3440.19)
ETH_MDC: U1.AC20 U5.12 | length 714.3
  Top w4: U5.12@2198.22,3239.33 v1(2229.06,3239.33) ; U1.AC20@2731.04,3500.11 v2@2749.86,3518.93
  Signal Layer 1 w4: v1(2229.06,3239.33) 2241.67,3226.72 2280.52,3226.72 2294.98,3241.18 2330.1,3241.18 2371.63,3282.71 2468.13,3282.71 2649.56,3464.14 2711.22,3464.14 2750.59,3503.51 v2(2750.59,3518.93)
ETH_MDIO: R18.1 U1.AF19 U5.11 | length 992.7
  Top w4: U5.11@2198.22,3219.65 2230.59,3219.65 2237.61,3226.68 R18.1@2259.27,3226.68 v1(2274.31,3241.72) ; U1.AF19@2769.98,3619.38 v2@2769.98,3649.42
  Signal Layer 1 w4: v1(2274.31,3241.72) 2303.32,3270.73 2348.34,3270.73 2436.99,3359.38 2533.48,3359.38 2646.24,3472.14 2684.94,3472.14 2725.72,3512.92 2725.72,3514.57 2744.58,3533.43 2756.6,3533.43 2759.2,3530.83 2799.97,3530.83 2807.95,3538.81 2848.72,3538.81 2856.96,3547.04 2859.3,3547.04 2866.36,3554.1 2868.02,3555.76 2868.02,3579.49 2826.86,3620.65 2799.34,3620.65 v2(2770.28,3649.72)
ETH_RST: R57.2 U1.AE19 U5.32 | length 1514.4
  Top w4: U1.AE19@2770.41,3578.85 v2@2789.23,3597.67
  Top w5.16: R57.2@1807.51,3254.76 1901.9,3254.76 1959.64,3197.02 1959.64,3196.5 1971.35,3184.79 v1(1972.18,3184.79) ; v1@1974.57,3184.79 1977.45,3181.9 2003.69,3181.9 U5.32@2005.31,3180.28
  Signal Layer 3 w5.16: v1(1972.18,3184.79) 1974.21,3184.79 2032.68,3243.25 2032.68,3293.18 2089.28,3349.78 2164.13,3349.78 2446.57,3632.22 2731.45,3632.22 2770.01,3670.78 2860.13,3670.78 2879.99,3650.92 2879.99,3646.64 2856.25,3622.9 2833.24,3622.9 2808,3597.67 v2(2789.96,3597.67)
ETH_RXC: U1.AE13 U5.19 | length 1115.4
  Top w5.73: U5.19@2131.29,3345.63 v1(2131.29,3374.41) ; U1.AE13@3006.63,3578.85 v2@3025.45,3597.67
  Signal Layer 4 w3.96: v1(2131.29,3374.41) 2131.29,3390.28 2152.8,3411.78 2291.63,3411.78 2454.63,3574.78 2634.46,3574.78 2636.44,3574.78 2636.44,3581.82 2670.39,3581.82 2670.39,3572.78 2704.35,3572.78 2704.35,3589.48 2738.3,3589.48 2738.3,3572.78 2772.26,3572.78 2772.26,3579.43 2806.21,3579.43 2806.21,3574.78 2848.72,3574.78 2883.13,3574.78 2886.13,3571.78 2901.08,3571.78 2902.07,3572.78 2982.39,3572.78 3007.29,3597.67 v2(3026.18,3597.67)
ETH_RXD0: U1.V16 U5.16 | length 1084.7
  Top w5.73: U5.16@2198.22,3318.07 v1(2229.06,3318.07) ; v2(2866.98,3282.71) 2867.11,3282.71 2887.53,3303.13 U1.V16@2887.53,3303.26
  Signal Layer 3 w3.96: v1(2229.06,3318.07) 2196.13,3285.14 2196.13,3222.78 2225.22,3193.69 2293.04,3193.69 2322.13,3164.6 2400.83,3164.6 2417.67,3164.6 2419.31,3166.24 2443.32,3190.25 2539.73,3093.84 2563.74,3117.85 2518.63,3162.96 2520.26,3164.6 2523.06,3164.6 2616.28,3257.82 2784.31,3257.82 2785.31,3256.81 2842.8,3256.81 2866.98,3280.99 v2(2866.98,3282.71)
ETH_RXD1: U1.W17 U5.15 | length 1138.6
  Top w5.73: U5.15@2198.22,3298.39 v1(2238.98,3298.39) ; U1.W17@2849.15,3342.63 v2@2867.97,3361.45
  Signal Layer 3 w3.96: v1(2238.98,3298.39) 2237.48,3296.88 2226.05,3296.88 2204.08,3274.91 2204.08,3268.82 2214.08,3258.83 2214.08,3231.96 2238.98,3207.05 2295.04,3207.05 2309.52,3192.57 2424.33,3192.57 2494.39,3262.63 2501.66,3269.9 2503.97,3269.9 2503.97,3210.61 2537.93,3210.61 2537.93,3307.6 2571.88,3307.6 2571.88,3258.62 2605.84,3258.62 2605.84,3307.6 2607.82,3307.6 2676.27,3307.6 2705.22,3336.56 2827.86,3336.56 2842.68,3351.37 2858.62,3351.37 v2(2868.7,3361.45)
ETH_RXD2: U1.AD18 U5.14 | length 1222.2
  Top w5.73: U5.14@2198.22,3278.7 v1(2229.06,3278.7) ; U1.AD18@2809.78,3539.48 v2@2828.6,3558.3
  Signal Layer 1 w3.96: v1(2229.06,3278.7) 2310.41,3278.7 2343.49,3311.78 2378.11,3311.78 2433.69,3367.36 2477.71,3367.36 2489.53,3379.18 2490.92,3380.58 2431.26,3440.24 2455.27,3464.25 2525.98,3393.54 2549.99,3417.55 2526.47,3441.07 2550.48,3465.08 2589.19,3426.37 2613.2,3450.38 2541.77,3521.81 2565.78,3545.82 2622.02,3489.58 2642.4,3509.95 2671.25,3538.81 2738.68,3538.81 2741.28,3541.41 2759.9,3541.41 2762.5,3538.81 2790.94,3538.81 2810.43,3558.3 v2(2829.33,3558.3)
ETH_RXD3: U1.AF18 U5.13 | length 1138.3
  Top w5.73: U5.13@2198.22,3259.02 v1(2238.98,3259.02) ; U1.AF18@2809.35,3619.38 v2@2809.35,3649.42
  Signal Layer 3 w3.96: v1(2238.98,3259.02) 2386.56,3259.02 2545.15,3417.62 2546.55,3419.02 2524.5,3441.07 2548.51,3465.08 2612.39,3401.2 2636.4,3425.21 2542.24,3519.37 2566.25,3543.38 2618.58,3491.05 2632.48,3504.94 2638.97,3504.94 2652.17,3518.14 2686.33,3552.3 2686.33,3562.98 2748.73,3625.38 2785.31,3625.38 v2(2809.65,3649.72)
ETH_RXDV: U1.AC19 U5.18 | length 782.6
  Top w4: U5.18@2150.98,3345.63 v1(2150.98,3388.78) ; U1.AC19@2770.41,3500.11 2771.71,3500.11 2787.93,3516.33 v2(2789.96,3516.33)
  Signal Layer 4 w4: v1(2150.98,3388.78) 2291.91,3388.78 2442.7,3539.57 2770.28,3539.57 2781.48,3528.36 2781.48,3525.53 2789.96,3517.05 v2(2789.96,3516.33)
ETH_RXER: U1.AD19 U5.20 | length 974.3
  Top w4: U5.20@2111.61,3345.63 v1(2111.61,3388.78) ; U1.AD19@2770.41,3539.48 v2@2789.23,3558.3
  Signal Layer 4 w4: v1(2111.61,3388.78) 2111.61,3372.88 2125.11,3359.38 2164.51,3359.38 2179.91,3374.78 2380.13,3374.78 2506.37,3501.03 2832.54,3501.03 2842.68,3511.16 2842.68,3511.77 2843.83,3512.92 2843.83,3537.22 2837.26,3543.8 2804.46,3543.8 v2(2789.96,3558.3)
ETH_TXC: U1.AF13 U5.22 | length 1115.5
  Top w5.73: U5.22@2072.24,3345.63 v1(2072.24,3388.78) ; U1.AF13@3006.2,3619.38 v2@3006.2,3649.42
  Signal Layer 4 w3.96: v1(2072.24,3388.78) 2072.84,3389.39 2091.03,3389.39 2131.29,3429.65 2253.3,3429.65 2441.87,3618.22 2975,3618.22 v2(3006.5,3649.72)
ETH_TXD0: U1.AA18 U5.24 | length 1192.2
  Top w5.73: U5.24@2032.87,3345.63 2032.87,3379.01 2036.63,3382.77 v1(2036.63,3385.01) ; U1.AA18@2809.78,3421.37 v2@2828.6,3440.19
  Signal Layer 2 w3.96: v1(2036.63,3385.01) 2035.68,3384.06 2035.68,3370.1 2074,3331.78 2162.96,3331.78 2164.23,3333.05 2319.62,3333.05 2330.6,3322.08 2392.37,3322.08 2401.47,3322.08 2401.47,3344.98 2435.43,3344.98 2435.43,3222.08 2469.38,3222.08 2469.38,3322.08 2471.36,3322.08 2525.21,3375.93 2665.97,3375.93 2705.34,3415.3 2785.54,3415.3 2810.43,3440.19 v2(2829.33,3440.19)
ETH_TXD1: U1.AB18 U5.25 | length 1198.9
  Top w5.73: v1(1962.16,3318.07) U5.25@2005.31,3318.07 ; U1.AB18@2809.78,3460.74 v2@2828.6,3479.56
  Signal Layer 2 w3.96: v1(1962.16,3318.07) 1995.37,3351.29 1995.37,3372.47 2026.66,3403.76 2306.92,3403.76 2343.35,3440.19 2473.34,3440.19 2475.32,3440.19 2475.32,3531.53 2509.27,3531.53 2509.27,3440.19 2553.74,3440.19 2686.35,3440.19 2710.3,3464.14 2813.91,3464.14 v2(2829.33,3479.56)
ETH_TXD2: U1.AE17 U5.26 | length 1199.6
  Top w5.73: v1(1976.53,3298.39) U5.26@2005.31,3298.39 ; U1.AE17@2849.15,3578.85 2868.79,3598.49 v2(2869.52,3598.49)
  Signal Layer 2 w3.96: v1(1976.53,3298.39) 1960.67,3298.39 1947.18,3311.87 1947.18,3335.82 2064.15,3452.78 2375.49,3452.78 2498.64,3575.93 2500.62,3577.91 2500.62,3622.64 2534.57,3622.64 2534.57,3612.15 2572.6,3612.15 2854.22,3612.15 2867.88,3598.49 v2(2869.52,3598.49)
ETH_TXD3: U1.AF17 U5.27 | length 1222.2
  Top w5.73: v1(1962.16,3278.7) U5.27@2005.31,3278.7 ; v2(2842.68,3643.38) 2842.68,3641.71 2848.72,3635.67 U1.AF17@2848.72,3619.38
  Signal Layer 1 w3.96: v1(1962.16,3278.7) 1978.03,3278.7 2003.13,3303.8 2003.13,3315.78 2017.89,3330.54 2017.89,3387.45 2047.99,3417.55 2185.83,3417.55 2251.87,3483.59 2263.92,3483.59 2267.95,3479.56 2280,3479.56 2471.66,3671.22 2519.66,3671.22 2521.64,3671.22 2521.64,3698.36 2555.6,3698.36 2555.6,3671.22 2585.48,3671.22 2814.83,3671.22 v2(2842.68,3643.38)
ETH_TXEN: U1.Y16 U5.23 | length 952.2
  Top w4: U5.23@2052.55,3345.63 2052.87,3345.95 2052.87,3373.47 v1(2053.18,3373.78) ; U1.Y16@2888.52,3382 v2@2907.34,3400.82
  Signal Layer 4 w4: v1(2053.18,3373.78) 2090.58,3336.38 2365.21,3336.38 2365.41,3336.58 2637.33,3336.58 2637.47,3336.44 2640.78,3336.44 2683.57,3379.22 2886.47,3379.22 v2(2908.07,3400.82)
ETH_TXER: U1.AA17 U5.31 | length 1083.5
  Top w4: v1(1972.78,3205.39) 1975.02,3205.39 1980.45,3199.96 U5.31@2005.31,3199.96 ; U1.AA17@2849.15,3421.37 v2@2867.97,3440.19
  Signal Layer 2 w4: v1(1972.78,3205.39) 2005.4,3172.78 2541.37,3172.78 2715.54,3346.95 2717.23,3346.95 2730.91,3360.63 2730.91,3362.27 2750.64,3382 2791.65,3382 2811.15,3401.5 2811.15,3403.14 2830.65,3422.65 2832.29,3422.65 2849.84,3440.19 v2(2868.7,3440.19)
FPGA_CLK_N: U1.AF14 U12.28 | length 30
  Top w5.16: U1.AF14@2966.83,3619.38 v2@2966.83,3649.42
  other v2: 2967.13,3649.72
FPGA_CLK_P: U1.AD14 U12.27 | length 26.6
  Top w5.16: U1.AD14@2967.26,3539.48 v2@2986.08,3558.3
  other v2: 2986.81,3558.3